# EAGLE board untitled (EAGLE 9.6.2)
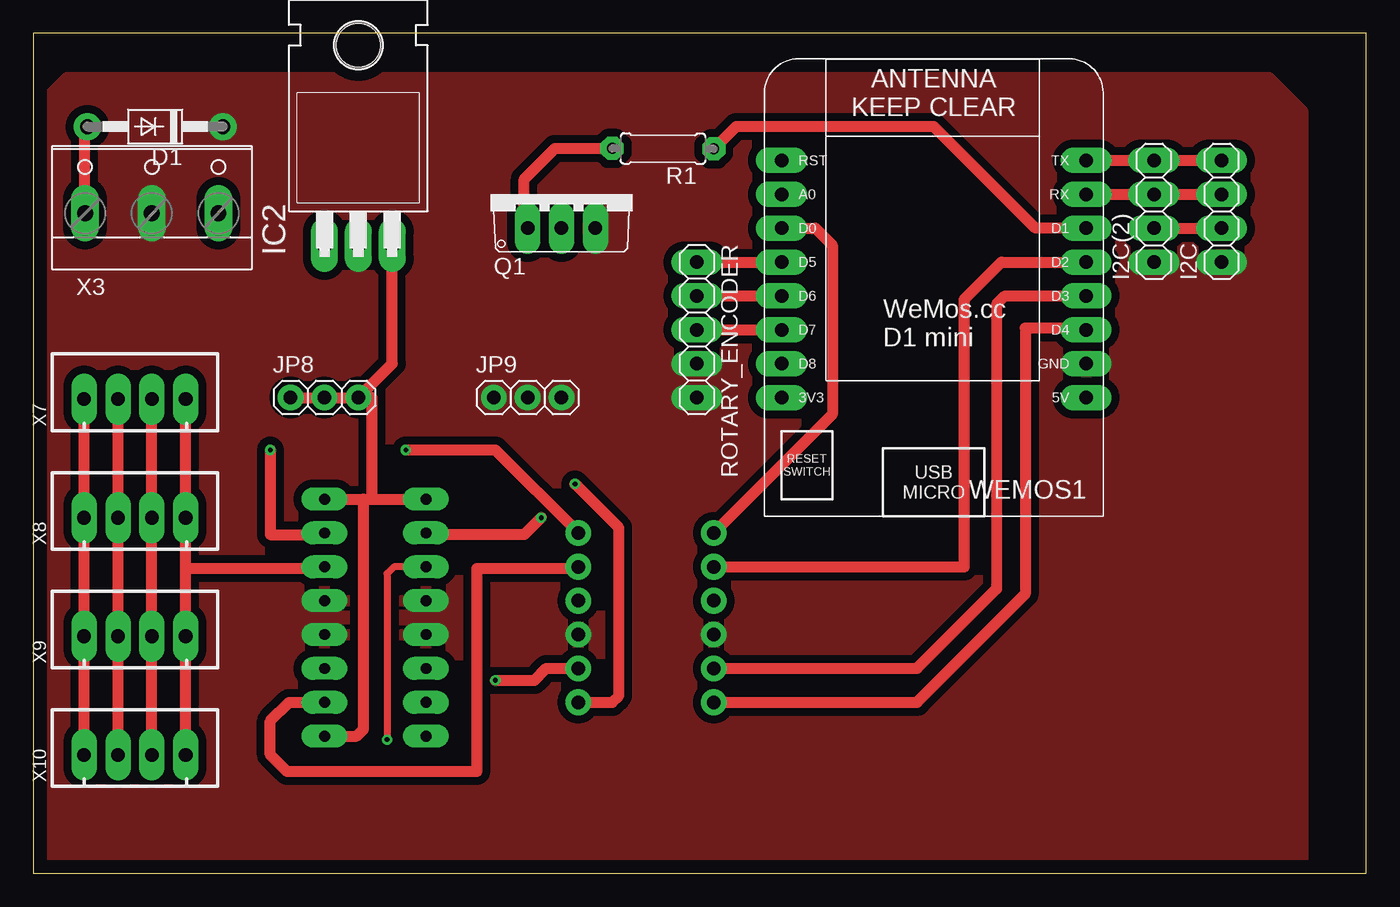
[diagram p0: board, top side]
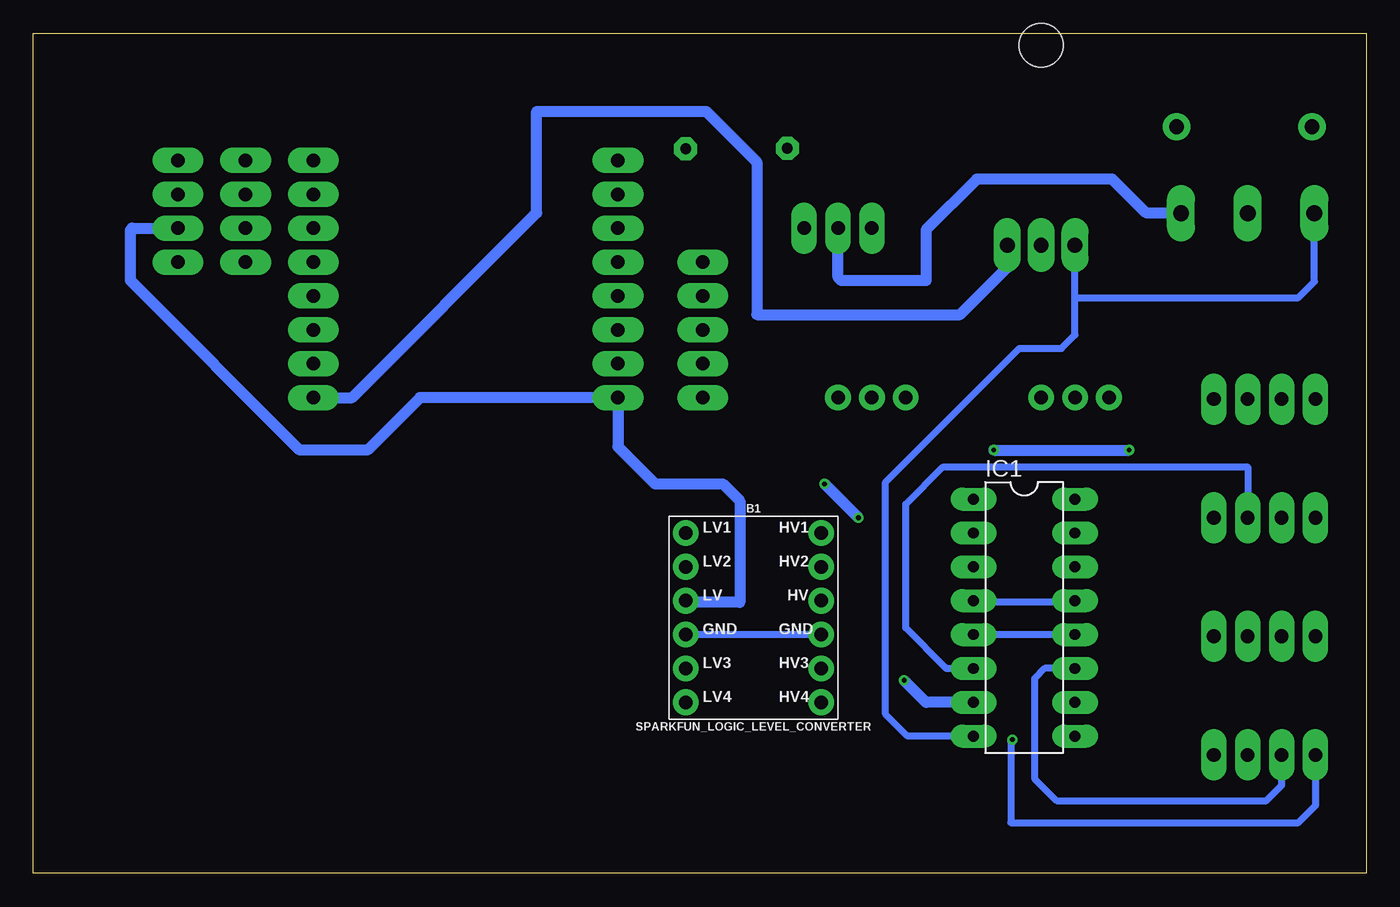
[diagram p1: board, bottom side, seen from below]

Size 100 x 63 mm. Coordinates in mm from the lower left corner, seen from the top.
Outline: 0,0 100,0 100,63 0,63 0,0
Copper layers (1*16): Top 0.035mm / dielectric 1.5mm / Bottom 0.035mm
Design rules "default *": minimum track width 6mil, minimum drill 0.35mm, track to track 6mil, track to pad 6mil, pad to pad 6mil, via to via 6mil, smd to smd 6mil, copper to edge 40mil, drill to drill 6mil, minimum pad ring 18mil, minimum via ring 8mil, stop-mask expansion 4mil, vias tented up to drill 0mil, thermal gap 0mil

## Footprints (pad centres in the part's own frame; a part is rotated, then mirrored left to right if it is on the bottom)
SPARKFUN_LOGIC_LEVEL_CONVERTER = drill 1.016 pad 1.88: GND1 -5.08,-1.27; GND2 5.08,-1.27; HV 5.08,1.27; HV1 5.08,6.35; HV2 5.08,3.81; HV3 5.08,-3.81; HV4 5.08,-6.35; LV -5.08,1.27; LV1 -5.08,6.35; LV2 -5.08,3.81; LV3 -5.08,-3.81; LV4 -5.08,-6.35
DO41-10 = drill 1.118 pad 1.93: A 5.08,0; C -5.08,0
1X04 = drill 1.016 long: 1 -3.81,0; 2 -1.27,0; 3 1.27,0; 4 3.81,0
DIL16 = drill 0.813 long: 1 -8.89,-3.81; 2 -6.35,-3.81; 3 -3.81,-3.81; 4 -1.27,-3.81; 5 1.27,-3.81; 6 3.81,-3.81; 7 6.35,-3.81; 8 8.89,-3.81; 9 8.89,3.81; 10 6.35,3.81; 11 3.81,3.81; 12 1.27,3.81; 13 -1.27,3.81; 14 -3.81,3.81; 15 -6.35,3.81; 16 -8.89,3.81
TO220H = drill 1.118 long: 1 -2.54,-10.16; 2 0,-10.16; 3 2.54,-10.16 | hole 3.302: 0,4.826
1X03 = drill 1.016: 1 -2.54,0; 2 0,0; 3 2.54,0
TO220V = drill 1.016 long: 1 -2.54,-2.54; 2 0,-2.54; 3 2.54,-2.54
0207/7 = drill 0.813 octagon: 1 -3.81,0; 2 3.81,0
1X05 = drill 1.016 long: 1 -5.08,0; 2 -2.54,0; 3 0,0; 4 2.54,0; 5 5.08,0
WEMOS-D1-MINI = drill 1.016 pad 1.829 long: 3V3 -10.16,-10.16; 5V 12.7,-10.16; A0 -10.16,5.08; D0 -10.16,2.54; D1 12.7,2.54; D2 12.7,0; D3 12.7,-2.54; D4 12.7,-5.08; D5 -10.16,0; D6 -10.16,-2.54; D7 -10.16,-5.08; D8 -10.16,-7.62; GND 12.7,-7.62; RESET -10.16,7.62; RX 12.7,5.08; TX 12.7,7.62
W237-103 = drill 1.194 long: 1 -5,-1.29; 2 0,-1.29; 3 5,-1.29
JST-XH-04-PACKAGE-LONG-PAD = drill 1.016 long: 1 -3.81,0; 2 -1.27,0; 3 1.27,0; 4 3.81,0

## Placement (x,y rotation side)
B1  SPARKFUN_LOGIC_LEVEL_CONVERTER  [SPARKFUN_LOGIC_LEVEL_CONVERTER]  45.97,19.18 0 bottom
D1  1N4004  [DO41-10]  9.14,56.01 180 top
I2C  [1X04]  89.15,49.66 90 top
I2C(2)  [1X04]  84.07,49.66 90 top
IC1  [DIL16]  25.65,19.18 270 bottom
IC2  7805T  [TO220H]  24.38,57.28 0 top
JP8  [1X03]  21.84,35.69 0 top
JP9  [1X03]  37.08,35.69 0 top
Q1  [TO220V]  39.62,50.93 0 top
R1  [0207/7]  47.24,54.36 179.7 top
ROTARY_ENCODER  [1X05]  49.78,40.77 270 top
WEMOS1  [WEMOS-D1-MINI]  66.29,45.85 0 top
X3  [W237-103]  8.89,50.8 0 top
X7  JST-XH-04-PIN-LONG-PAD  [JST-XH-04-PACKAGE-LONG-PAD]  7.62,35.56 0 top
X8  JST-XH-04-PIN-LONG-PAD  [JST-XH-04-PACKAGE-LONG-PAD]  7.62,26.67 0 top
X9  JST-XH-04-PIN-LONG-PAD  [JST-XH-04-PACKAGE-LONG-PAD]  7.62,17.78 0 top
X10  JST-XH-04-PIN-LONG-PAD  [JST-XH-04-PACKAGE-LONG-PAD]  7.62,8.89 0 top

## Library data of the parts
B1 = SparkFun-Boards
D1 IC2 JP8 JP9 Q1 = adafruit
I2C I2C(2) ROTARY_ENCODER = pinhead
IC1 = ic-package
R1 = rcl; SPICEPREFIX: R
WEMOS1 = esp8266modules
X3 = con-wago-500; MPN: 237-103; OC_FARNELL: unknown; OC_NEWARK: 18M7116
X7-X10 = Rembrandt Electronics - JST XH Connectors v1-0

## Nets
5V: IC1.1 IC1.9 IC1.16 IC2.3 JP8.1 JP8.2 JP8.3 WEMOS1.5V
GND: B1.GND1 B1.GND2 D1.C I2C(2).1 I2C.1 IC1.4 IC1.5 IC1.12 IC1.13 IC2.2 JP9.1 JP9.2 JP9.3 Q1.3 ROTARY_ENCODER.4 ROTARY_ENCODER.5 WEMOS1.GND X3.2
HV: B1.HV
N$1: IC1.3 X7.1 X8.1 X9.1 X10.1
N$2: IC1.11 X7.2 X8.2 X9.2 X10.2
N$3: B1.HV1 IC1.15
N$4: IC1.14 X7.4 X8.4 X9.4 X10.4
N$5: B1.LV1 WEMOS1.D0
N$6: Q1.2 X3.3
N$7: I2C(2).4 I2C.4 WEMOS1.TX
N$8: I2C(2).3 I2C.3 WEMOS1.RX
N$9: B1.LV2 WEMOS1.D2
N$10: Q1.1 R1.2
N$11: B1.LV3 WEMOS1.D3
N$12: B1.LV4 WEMOS1.D4
N$13: ROTARY_ENCODER.1 WEMOS1.D5
N$14: ROTARY_ENCODER.2 WEMOS1.D6
N$15: ROTARY_ENCODER.3 WEMOS1.D7
N$16: R1.1 WEMOS1.D1
N$17: B1.LV I2C(2).2 I2C.2 WEMOS1.3V3
N$18: B1.HV2 IC1.10
N$19: B1.HV3 IC1.7
N$20: B1.HV4 IC1.2
N$23: IC1.6 X7.3 X8.3 X9.3 X10.3
VCC: D1.A IC1.8 IC2.1 X3.1

## Tracks (layer width: path | path; a pad name or v marks a point on that pad's centre or on a via)
5V
  Top 0.508: JP8.2 JP8.1
  Top 0.813: IC1.16 24.77,28.07 | 24.77,28.07 25.4,28.07 | 25.4,28.07 IC1.1 | JP8.1 JP8.3 | JP8.3 25.4,35.69 25.4,28.07 | JP8.3 26.92,38.23 IC2.3 | IC1.9 24.26,10.29 24.77,10.79 24.77,28.07
  Bottom 0.813: WEMOS1.5V 76.07,35.69 62.23,49.53 62.23,57.15 49.53,57.15 45.72,53.34 45.72,41.91 30.48,41.91 26.92,45.47 IC2.3
GND
  Bottom 0.508: IC1.12 IC1.5 | IC1.13 22.73,20.45 22.86,20.32 29.34,20.32 IC1.4 | B1.GND2 B1.GND1
  pour Top (isolate 0.6): 0,0 0,57.15 2.54,59.69 92.71,59.69 95.25,57.15 95.25,0
N$1  (via drill 0.35)
  Top 0.508: IC1.3 27.05,22.99 26.54,22.48 v26.54,10.03
  Top 0.813: X10.1 X9.1 X8.1 X7.1
  Bottom 0.508: X10.1 3.81,5.08 5.08,3.81 26.67,3.81 26.67,9.91 v26.54,10.03
N$2
  Top 0.813: X10.2 X9.2 X8.2 X7.2
  Bottom 0.508: IC1.11 24.13,15.37 24.89,14.61 24.89,7.11 23.24,5.46 7.49,5.46 6.35,6.6 X10.2
N$3  (via drill 0.35)
  Top 0.813: B1.HV1 34.67,31.75 v27.94,31.75 | v17.78,31.75 17.78,25.4 21.72,25.4 IC1.15
  Bottom 0.813: v27.94,31.75 v17.78,31.75
N$4
  Top 0.813: X10.4 X9.4 11.43,22.86 | X7.4 X8.4 11.43,22.86 | IC1.14 21.72,22.86 11.43,22.86
  Bottom 0.508: IC1.14 21.72,22.86
N$5
  Top 0.813: WEMOS1.D0 58.67,48.39 59.94,47.12 59.94,34.42 B1.LV1
N$6
  Bottom 0.813: X3.3 16.49,49.51 19.05,52.07 29.21,52.07 33.02,48.26 33.02,44.45 39.37,44.45 39.62,44.7 Q1.2
N$7
  Top 0.813: WEMOS1.TX I2C(2).4 I2C.4
N$8
  Top 0.813: WEMOS1.RX I2C(2).3 I2C.3
N$9
  Top 0.813: B1.LV2 69.85,22.99 69.85,43.05 72.64,45.85 WEMOS1.D2
N$10
  Top 0.813: Q1.1 36.83,48.64 36.83,52.07 39.14,54.38 R1.2
N$11
  Top 0.813: B1.LV3 66.29,15.37 72.26,21.34 72.26,42.67 72.9,43.31 WEMOS1.D3
N$12
  Top 0.813: WEMOS1.D4 78.87,40.89 74.42,40.89 74.42,20.95 66.29,12.83 B1.LV4
N$13
  Top 0.813: ROTARY_ENCODER.1 WEMOS1.D5
N$14
  Top 0.813: ROTARY_ENCODER.2 WEMOS1.D6
N$15
  Top 0.813: ROTARY_ENCODER.3 WEMOS1.D7
N$16
  Top 0.813: WEMOS1.D1 75.18,48.39 67.56,56.01 52.73,56.01 R1.1
N$17
  Top 0.813: I2C(2).2 I2C.2
  Bottom 0.813: I2C.2 92.58,48.39 92.71,48.26 92.71,44.45 80.01,31.75 74.93,31.75 70.99,35.69 WEMOS1.3V3 56.13,32 53.34,29.21 48.26,29.21 46.99,27.94 46.99,20.32 50.93,20.32 B1.LV
N$18
  Top 0.813: B1.HV2 40.77,22.86 33.27,22.86 33.27,7.62 19.05,7.62 17.78,8.89 17.78,11.43 19.18,12.83 IC1.10
N$19  (via drill 0.35)
  Top 0.813: v34.67,14.48 37.59,14.48 38.48,15.37 B1.HV3
  Bottom 0.813: IC1.7 33.02,12.83 v34.67,14.48
N$20  (via drill 0.35)
  Top 0.813: B1.HV4 43.43,12.83 43.94,13.34 43.94,25.91 v40.64,29.21 | v38.1,26.67 36.83,25.4 29.59,25.4 IC1.2
  Bottom 0.813: v40.64,29.21 v38.1,26.67
N$23
  Top 0.813: X10.3 X9.3 X8.3 X7.3
  Bottom 0.508: X8.3 8.89,30.48 31.75,30.48 34.54,27.69 34.54,18.41 31.56,15.43 31.5,15.37 IC1.6
VCC
  Top 0.813: X3.1 3.81,49.43 3.81,55.75 D1.A
  Bottom 0.508: IC1.8 34.42,10.29 36.07,11.94 36.07,29.34 26.04,39.37 22.86,39.37 21.84,40.39 21.84,43.18 | 21.84,43.18 IC2.1 | 21.84,43.18 5.08,43.18 3.89,44.37 X3.1